# Altium PCB edge_connector_breakout.pcbdoc
Units mm, origin at the board's own origin, x right, y up, seen from the top; angles counter-clockwise.
Board outline 33.15 x 15.07 mm, 2 copper layers (Top Layer, Bottom Layer); 3 components, 0 nets, 20 pads, 0 vias.
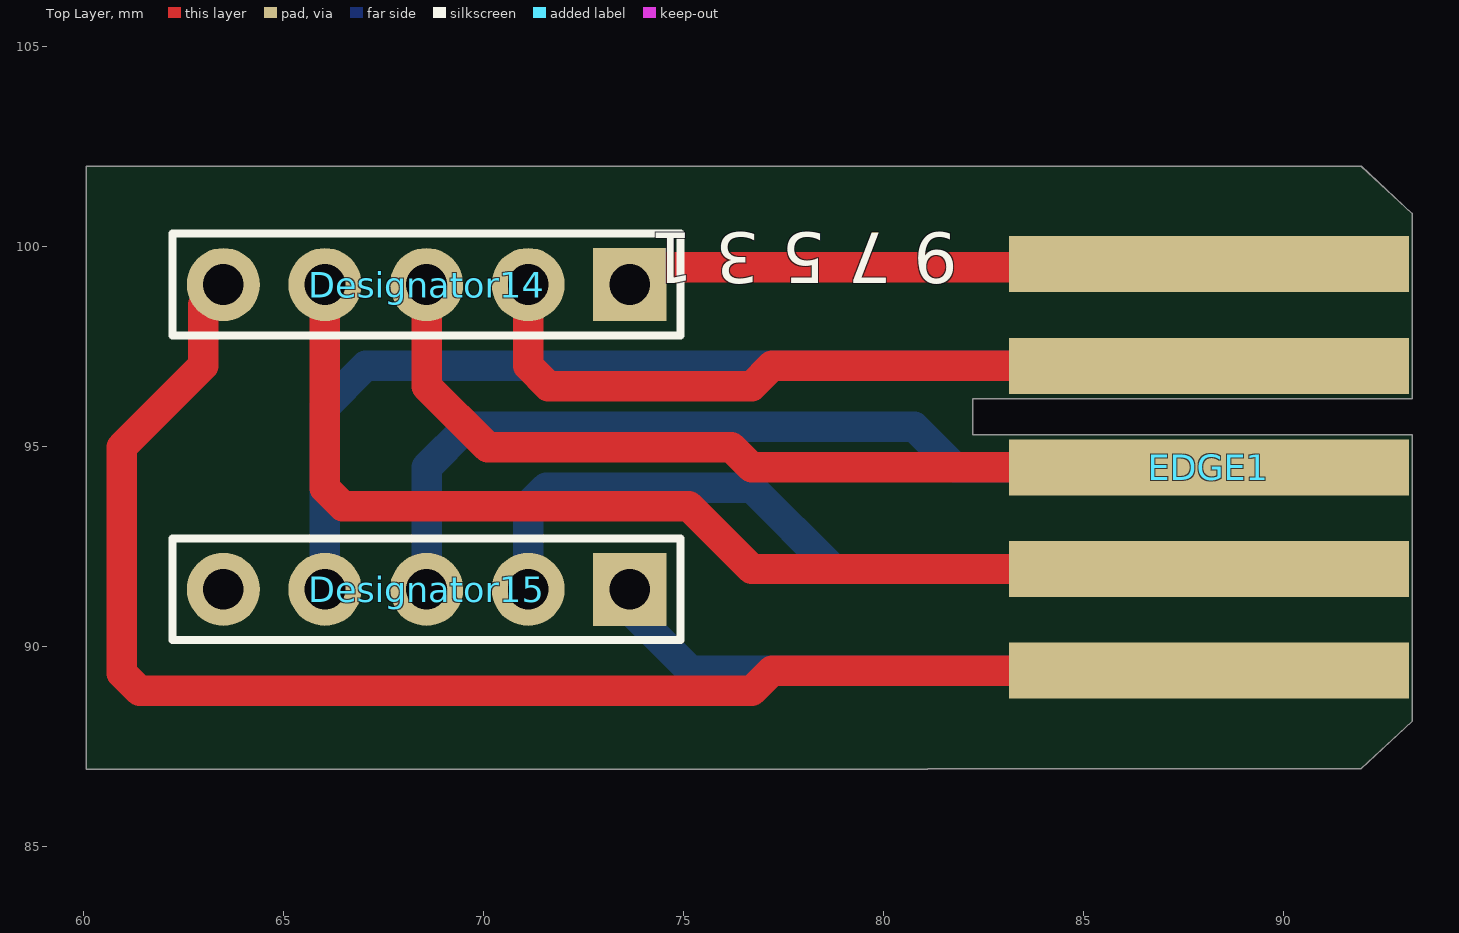
[diagram p0: Top Layer view]
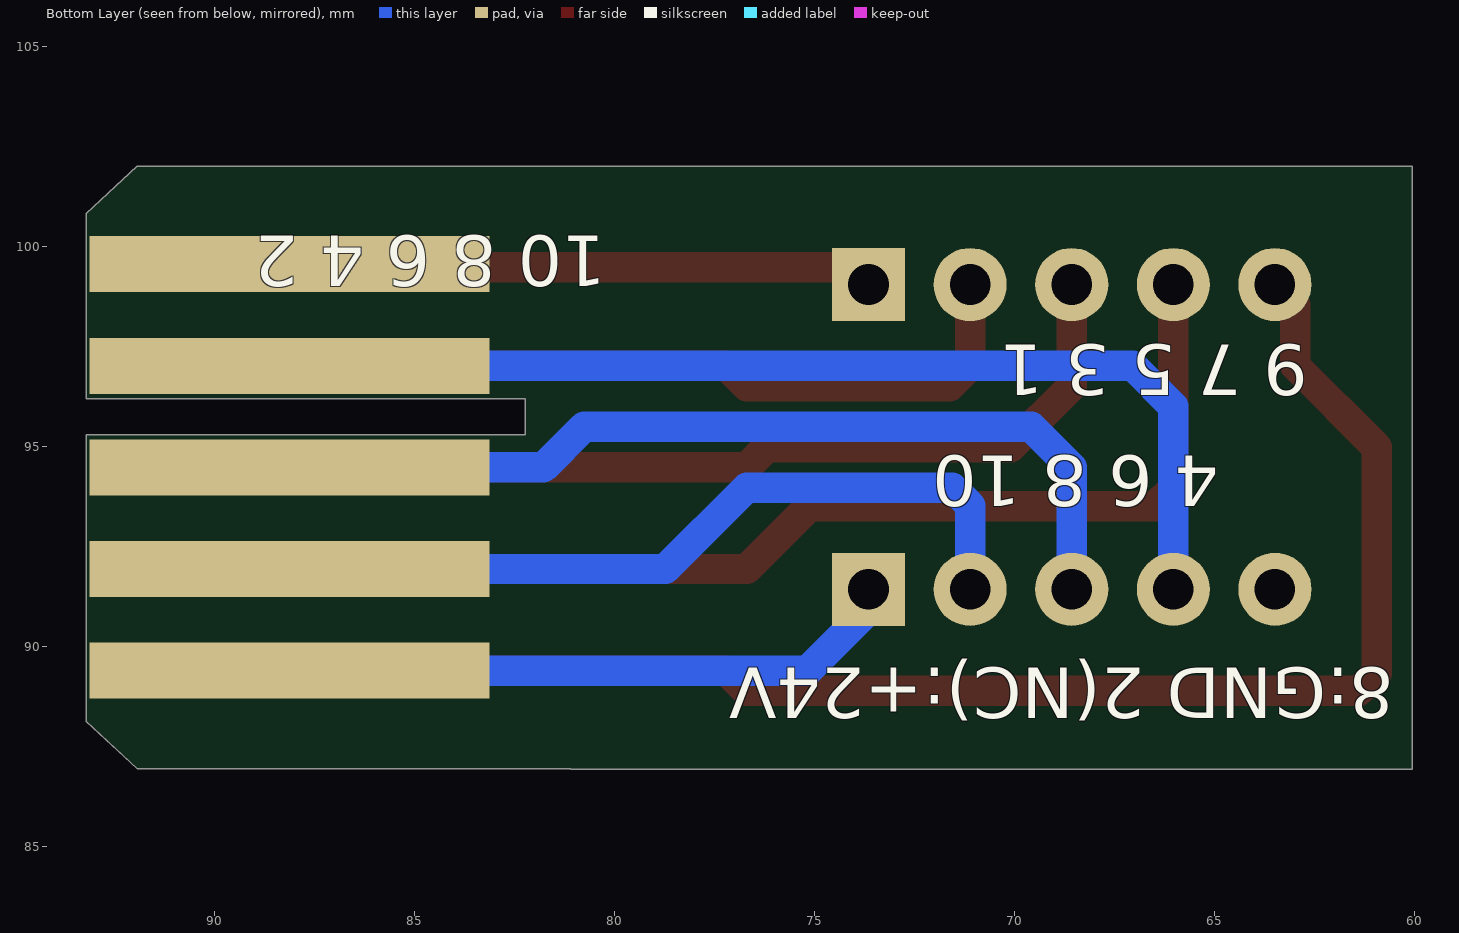
[diagram p1: Bottom Layer view, seen from below]

## Layer stack, top to bottom
Top Solder: solder mask 0.0102, Solder Resist, Dk 3.5
Top Layer: signal copper 0.0356
Dielectric 1: dielectric 0.32, FR-4, Dk 4.8
Bottom Layer: signal copper 0.0356
Bottom Solder: solder mask 0.0102, Solder Resist, Dk 3.5

## Board outline
60.071,86.946 81.104,86.946 81.116,86.958 91.948,86.958 93.218,88.138 93.218,95.308 82.238,95.308 82.238,96.208 93.218,96.208 93.218,100.838 91.948,102.018 81.116,102.018 81.111,102.013 60.071,102.013

## Design rules (kind name [scope] priority, off if disabled: settings)
BoardOutlineClearance Silk_to_Outline [(OnLayer('Top Overlay'))] p1: gap=0 ignorepadtopadclearanceinfootprint=FALSE
BoardOutlineClearance [All] p2: gap=0.508 ignorepadtopadclearanceinfootprint=FALSE
Clearance Clearance_Power [InNet('+*') OR InNet('-*') OR InNet('GND')] p1: gap=0.254 ignorepadtopadclearanceinfootprint=FALSE
Clearance [All] p2: gap=0.5 ignorepadtopadclearanceinfootprint=FALSE
HoleSize [All] p1: absolutevalues=TRUE maxlimit=5.08 minlimit=0.025 maxpercent=80.000 minpercent=20.000
MinimumSolderMaskSliver [All] p1: minsoldermaskwidth=0.127
PlaneConnect PlaneConnect_viaDirect [IsVia] p1: planeconnectstyle=Direct reliefexpansion=0.508 reliefentries=4 reliefconductorwidth=0.254 reliefairgap=0.254
PlaneConnect [All] p2: planeconnectstyle=Relief reliefexpansion=0.508 reliefentries=4 reliefconductorwidth=0.254 reliefairgap=0.254
PolygonConnect PolygonConnect_viaDirect [All vs isVia] p1: connectstyle=Direct reliefconductorwidth=0.254 reliefentries=4 polygonreliefangle="90 Angle" airgapwidth=0.254
PolygonConnect [All] p2: connectstyle=Relief reliefconductorwidth=0.254 reliefentries=4 polygonreliefangle="90 Angle" airgapwidth=0.254
RoutingVias [All] p1: holewidth=0.711 width=1.27 viastyle="Through Hole" minholewidth=0.711 minwidth=1.27 maxholewidth=0.711 maxwidth=1.27
SilkToSilkClearance [All] p1: silktosilkclearance=0.127
SilkToSolderMaskClearance [IsPad] p1: minsilkscreentomaskgap=0.127 clearancetoexposedcopper=TRUE
SolderMaskExpansion [All] p1: expansion=0.102 istentingtop=FALSE
Width [All] p1: maxlimit=2.54 minlimit=0.152 preferedwidth=0.203 minimp=50.000000 maximp=50.000000 favimp=50.000000
25 further rules are at their usual default settings.

## Components (designator, comment, footprint, x,y, rotation, side; value= is the part's Value field where it differs from the comment)
Designator14 "Comment" HDR1X5 73.66,99.06 r180 top
Designator15 "Comment" HDR1X5 73.66,91.44 r180 top
EDGE1 "Comment" EDGECONN10 88.138,99.568 r270 top

## Footprints (in the part's own frame and the unit in brackets; to place one, negate y for a bottom-side part, rotate by r counter-clockwise, add the part's x,y. Pads: shape width x height; smd on the part's side, far side on the other; paste and mask are expansions set on the pad)
EDGECONN10 [mm]
  rect 1.4x10 smd: 1(0,0) 3(2.54,0) 5(5.08,0) 7(7.62,0) 9(10.16,0)
  rect 1.4x10 smd far side: 2(0,0) 4(2.54,0) 6(5.08,0) 8(7.62,0) 10(10.16,0)
HDR1X5 [mil] "Connector; Header; 5 Position"
  rect 72x72 hole 40: 1(0,0)
  round 72 hole 40: 2(100,0) 3(200,0) 4(300,0) 5(400,0)
  silkscreen extent -50,-50 450,50

## Part data
EDGE1: library part 0ZRC0015FF1E

## Nets (pads, with @x,y where several pads share a name; then routed paths per layer and width w, separated by ;. In a path a pad name is that pad's centre, name@x,y a point inside that pad or via, vN(x,y) a via of type N, cw(c..) or ccw(c..) an arc to the next point about the centre after c; other vN are vias at no path point)
pads on no net: Designator14.1 Designator14.2 Designator14.3 Designator14.4 Designator14.5 Designator15.1 Designator15.2 Designator15.3 Designator15.4 Designator15.5 EDGE1.1 EDGE1.2 EDGE1.3 EDGE1.4 EDGE1.5 EDGE1.6 EDGE1.7 EDGE1.8 EDGE1.9 EDGE1.10
copper on no net: | length 200.1
  Top Layer w0.762: 63.5,99.06 62.992,98.552 62.992,97.028 60.96,94.996 60.96,89.346 61.406,88.9 76.708,88.9 77.216,89.408 87.376,89.408 ; 66.04,99.06 66.04,93.969 66.486,93.523 75.133,93.523 76.708,91.948 87.376,91.948 ; 68.58,99.06 68.58,96.52 70.104,94.996 76.2,94.996 76.708,94.488 86.868,94.488 ; 71.12,99.06 71.12,97.028 71.628,96.52 76.708,96.52 77.216,97.028 87.376,97.028 ; 73.66,99.06 74.092,99.492 88.062,99.492 88.138,99.568
  Bottom Layer w0.762: 66.04,91.44 66.04,96.012 67.056,97.028 87.376,97.028 ; 68.58,91.44 68.58,94.488 69.596,95.504 80.772,95.504 81.788,94.488 85.852,94.488 ; 71.12,91.44 71.12,93.534 71.566,93.98 76.708,93.98 78.74,91.948 87.376,91.948 ; 73.66,90.932 75.184,89.408 86.36,89.408

## Silkscreen, mask and mechanical layers (free items; w line width, h text height)
Top Overlay:
  text "9 7 5 3 1" at 81.864,100.355 h1.27 r180
Bottom Overlay:
  text "10 8 6 4 2" at 80.213,100.279 h1.27 r180
  text "9 7 5 3 1" at 62.675,97.55 h1.27 r180
  text "4 6 8 10" at 64.9,94.775 h1.27 r180
  text "8:GND 2(NC):+24V" at 60.525,89.475 h1.27 r180
Mechanical 1:
  lines w0.127: 83.638,86.958 81.116,86.958 81.104,86.946 60.071,86.946 60.071,102.013 81.111,102.013 81.116,102.018 83.638,102.018